# EAGLE board 411_Preliminary Design_ Group8_rev2 (EAGLE 9.6.2)
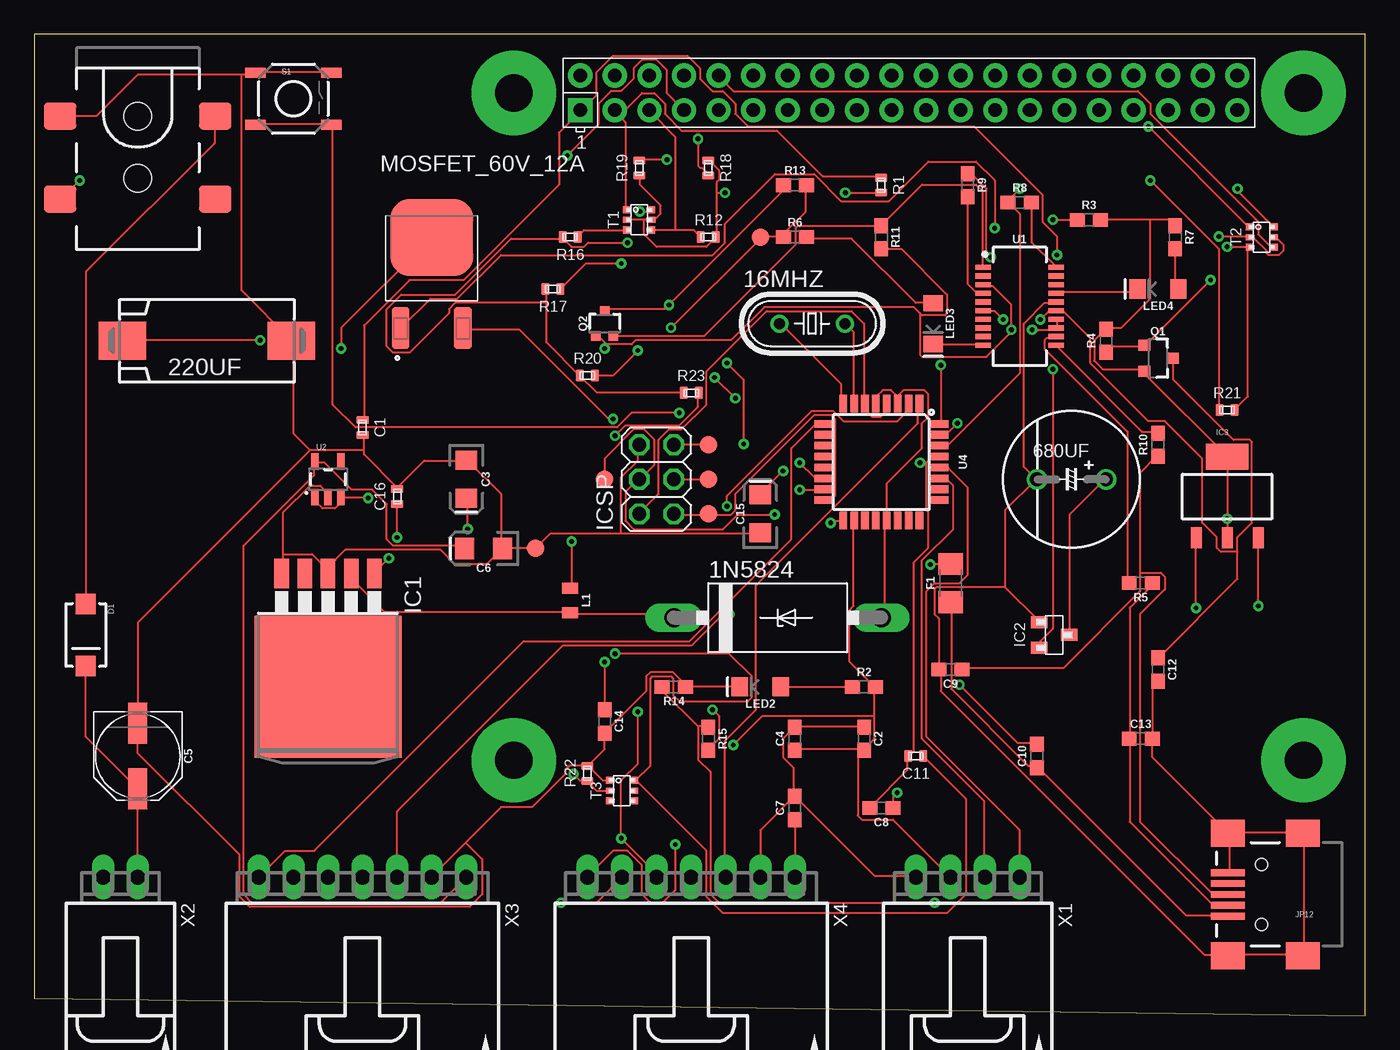
[diagram p0: board, top side]
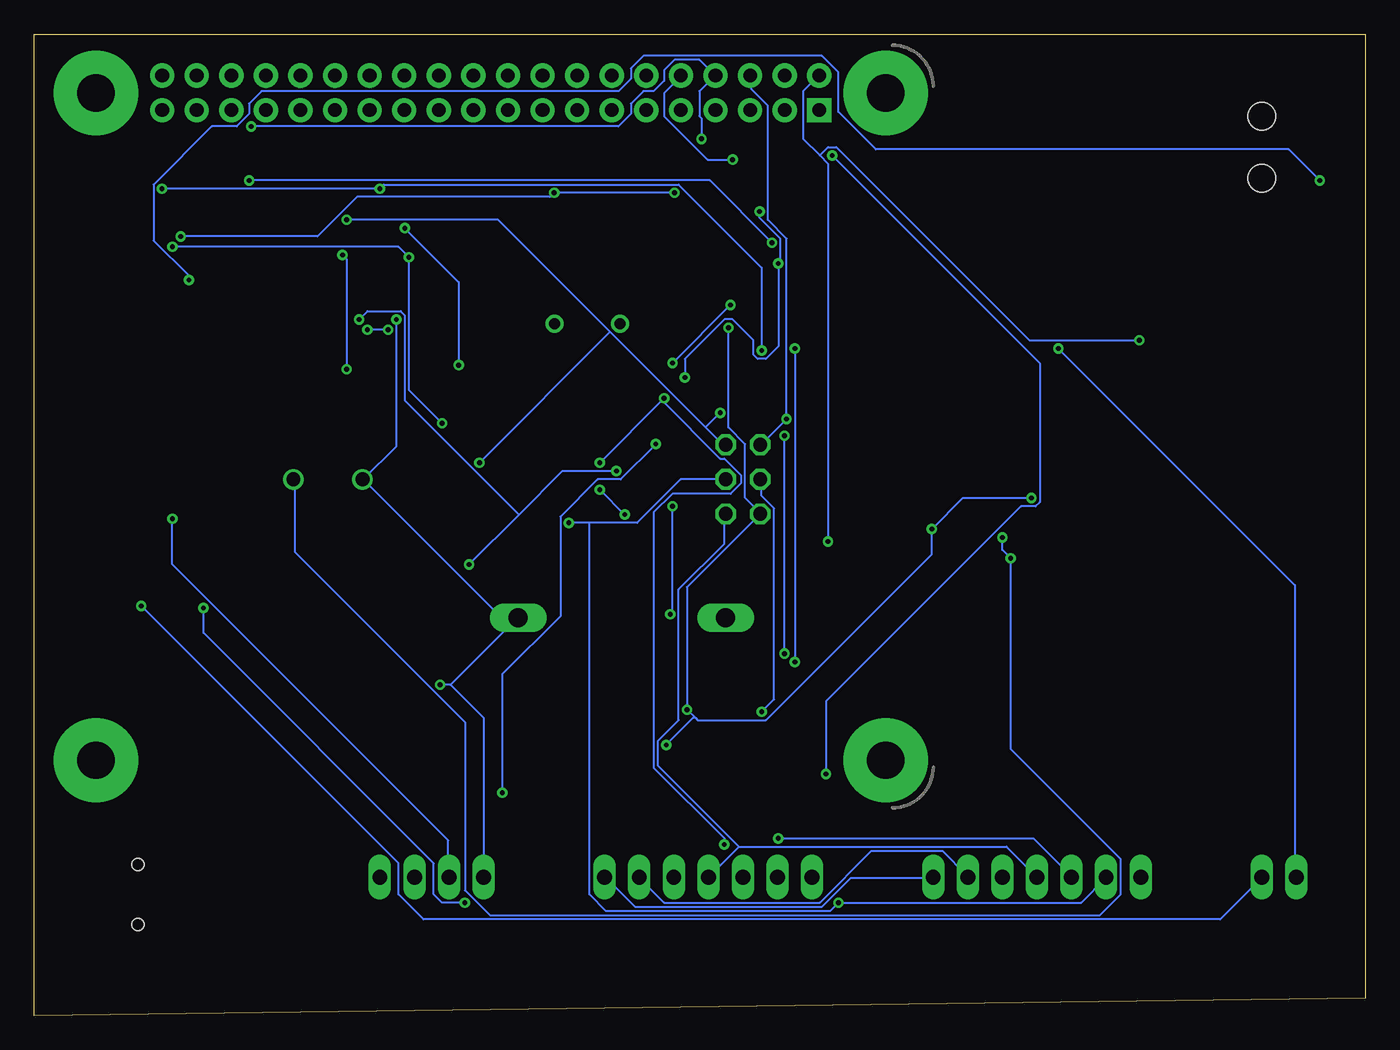
[diagram p1: board, bottom side, seen from below]

Size 97.79 x 72.06 mm. Coordinates in mm from the lower left corner, seen from the top.
Outline: 0,1.27 97.79,0 97.79,13.97 97.77,15.22 97.79,26.67 97.77,72.06 0,72.06 0,1.27
Copper layers (1*16): Top 0.035mm / dielectric 1.5mm / Bottom 0.035mm
Design rules "default": minimum track width 6mil, minimum drill 0.35mm, track to track 6mil, track to pad 6mil, pad to pad 6mil, via to via 6mil, smd to smd 6mil, copper to edge 40mil, drill to drill 6mil, minimum pad ring 10mil, minimum via ring 8mil, stop-mask expansion 4mil, vias tented up to drill 0mil, thermal gap 10mil

## Footprints (pad centres in the part's own frame; a part is rotated, then mirrored left to right if it is on the bottom)
CB429-15 = drill 1.397 long: A 7.62,0; C -7.62,0
HC49/S = drill 0.813: 1 -2.413,0; 2 2.413,0
139CLL-2R = smd 3.5 x 2.8: + 6.2,0; - -6.2,0
16V-10-5.08 = drill 1: + -2.54,0; - 2.54,0
C0402 = smd 0.9 x 0.6: 1 0,0.55; 2 0,-0.55
0603 = smd 1.1 x 1: 1 -0.85,0; 2 0.85,0
EIA3216 = smd 1.4 x 1.6: + 1.4,0; - -1.4,0
PANASONIC_D = smd 3 x 1.4: + 2.4,0; - -2.4,0
SMA-DIODE = smd 1.524 x 1.47: A -2.277,0; C 2.277,0
1206 = smd 1.6 x 1.8: 1 -1.4,0; 2 1.4,0
TO263-5 = smd 1.067 x 2.159: 1 -3.404,-5.791; 2 -1.702,-5.791; 3 0,-5.791; 4 1.702,-5.791; 5 3.404,-5.791 | smd 10.8 x 10.41: 6 0,2.54
SOT23 = smd 1.3 x 0.9: 1 -1.1,0.95; 2 -1.1,-0.95; 3 1.1,0
SOT223-ALT1 = smd 0.813 x 1.524: 1 -2.271,-3.02; 2 0,-3.02; 3 2.288,-3.02 | smd 3.124 x 1.905: 4 0,2.921
2X03 = drill 1.016 octagon: 1 -2.54,-1.27; 2 -2.54,1.27; 3 0,-1.27; 4 0,1.27; 5 2.54,-1.27; 6 2.54,1.27
POWER_JACK_SMD_OVERPASTE_SUPER_BOMB_DIGITY = smd 2 x 2.4: GND 0,-5.7; P$4 6.1,-5.7; VIN0 0,5.7; VIN1 6.1,5.7 | hole 2.032: 0,0; 4.572,0
USB-MINIB = smd 2.5 x 0.5: D+ 2.5,0; D- 2.5,0.8; GND 2.5,-1.6; ID 2.5,-0.8; VBUS 2.5,1.6 | smd 2.5 x 2: MTN1 -3,4.5; MTN2 2.5,4.5; MTN3 -3,-4.5; MTN4 2.5,-4.5 | hole 0.9: 0,2.2; 0,-2.2
0805 = smd 0.8 x 1.2: 1 -0.9,0; 2 0.9,0
LED-1206 = smd 1.2 x 1.4: A -1.5,0; C 1.5,0
DPAK3 = smd 1.31 x 3.08: 1 -2.29,-4.12; 2 2.29,-4.12 | smd 6.09 x 5.63: 3 0,2.51
SOT23-3@1 = smd 0.8 x 0.9: 1 -0.95,-1; 2 0.95,-1; 3 0,1.1
SOT323 = smd 0.7 x 0.7: 1 -0.65,-0.925; 2 0.65,-0.925; 3 0,0.925
TACTILE-SWITCH-SMD = smd 1.524 x 0.762: 1 -2.794,1.905; 2 2.794,1.905; 3 -2.794,-1.905; 4 2.794,-1.905
SOT363 = smd 0.6 x 0.5: 1 -0.9,0.75; 3 -0.9,-0.75; 4 0.9,-0.75; 6 0.9,0.75 | smd 0.6 x 0.4: 2 -0.9,0; 5 0.9,0
PAD.03X.05 = smd 1.27 x 1.27: P$1 0,0
SSOP20_L = smd 0.381 x 1.143: 1 -2.857,-2.68; 2 -2.223,-2.68; 3 -1.587,-2.68; 4 -0.953,-2.68; 5 -0.318,-2.68; 6 0.318,-2.68; 7 0.953,-2.68; 8 1.587,-2.68; 9 2.223,-2.68; 10 2.857,-2.68; 11 2.857,2.68; 12 2.223,2.68; 13 1.587,2.68; 14 0.953,2.68; 15 0.318,2.68; 16 -0.318,2.68; 17 -0.953,2.68; 18 -1.587,2.68; 19 -2.223,2.68; 20 -2.857,2.68
SOT23-5 = smd 0.55 x 1.2: 1 -0.95,-1.3; 2 0,-1.3; 3 0.95,-1.3; 4 0.95,1.3; 5 -0.95,1.3
TQFP32-08 = smd 1.27 x 0.559: 1 -4.293,2.8; 2 -4.293,2; 3 -4.293,1.2; 4 -4.293,0.4; 5 -4.293,-0.4; 6 -4.293,-1.2; 7 -4.293,-2; 8 -4.293,-2.8; 17 4.293,-2.8; 18 4.293,-2; 19 4.293,-1.2; 20 4.293,-0.4; 21 4.293,0.4; 22 4.293,1.2; 23 4.293,2; 24 4.293,2.8 | smd 0.559 x 1.27: 9 -2.8,-4.293; 10 -2,-4.293; 11 -1.2,-4.293; 12 -0.4,-4.293; 13 0.4,-4.293; 14 1.2,-4.293; 15 2,-4.293; 16 2.8,-4.293; 25 2.8,4.293; 26 2,4.293; 27 1.2,4.293; 28 0.4,4.293; 29 -0.4,4.293; 30 -1.2,4.293; 31 -2,4.293; 32 -2.8,4.293
70553-04 = drill 1.092 long: 1 -3.81,-7.62; 2 -1.27,-7.62; 3 1.27,-7.62; 4 3.81,-7.62
70553-02 = drill 1.092 long: 1 -1.27,-7.62; 2 1.27,-7.62
70553-07 = drill 1.092 long: 1 -7.62,-7.62; 2 -5.08,-7.62; 3 -2.54,-7.62; 4 0,-7.62; 5 2.54,-7.62; 6 5.08,-7.62; 7 7.62,-7.62
RASPI_BOARD_B+_EDGES_4DRILL_PAD = drill 1 pad 1.778 square: 1 8.37,51.23 | drill 1 pad 1.778: 2 8.37,53.77; 3 10.91,51.23; 4 10.91,53.77; 5 13.45,51.23; 6 13.45,53.77; 7 15.99,51.23; 8 15.99,53.77; 9 18.53,51.23; 10 18.53,53.77; 11 21.07,51.23; 12 21.07,53.77; 13 23.61,51.23; 14 23.61,53.77; 15 26.15,51.23; 16 26.15,53.77; 17 28.69,51.23; 18 28.69,53.77; 19 31.23,51.23; 20 31.23,53.77; 21 33.77,51.23; 22 33.77,53.77; 23 36.31,51.23; 24 36.31,53.77; 25 38.85,51.23; 26 38.85,53.77; 27 41.39,51.23; 28 41.39,53.77; 29 43.93,51.23; 30 43.93,53.77; 31 46.47,51.23; 32 46.47,53.77; 33 49.01,51.23; 34 49.01,53.77; 35 51.55,51.23; 36 51.55,53.77; 37 54.09,51.23; 38 54.09,53.77; 39 56.63,51.23; 40 56.63,53.77 | drill 2.75 pad 6.2: 41 3.5,3.5; 42 61.5,3.5; 43 61.5,52.5; 44 3.5,52.5

## Placement (x,y rotation side)
1N5824  [CB429-15]  54.61,29.21 0 top
16MHZ  [HC49/S]  57.15,50.8 0 top
220UF  [139CLL-2R]  12.7,49.53 180 top
680UF  [16V-10-5.08]  76.2,39.37 180 top
C1  2u2  [C0402]  24.13,43.18 180 top
C2  0.1uF  [0603]  60.96,20.32 270 top
C3  10uF  [EIA3216]  31.75,39.37 270 top
C4  0.1uF  [0603]  55.88,20.32 90 top
C5  47uF  [PANASONIC_D]  7.62,19.05 270 top
C6  10uF  [EIA3216]  33.02,34.29 180 top
C7  1.0uF  [0603]  55.88,15.24 90 top
C8  0.1uF  [0603]  62.23,15.24 180 top
C9  47pF  [0603]  67.31,25.4 180 top
C10  0.1uF  [0603]  73.66,19.05 90 top
C11  100n  [C0402]  64.77,19.05 90 top
C12  0.1uF  [0603]  82.55,25.4 270 top
C13  47pF  [0603]  81.28,20.32 0 top
C14  0.1uF  [0603]  41.91,21.59 270 top
C15  10uF  [EIA3216]  53.34,36.83 90 top
C16  2u2  [C0402]  26.67,38.1 0 top
D1  MBRA140  [SMA-DIODE]  3.81,27.94 270 top
F1  6V/0.5A  [1206]  67.31,31.75 90 top
IC1  LM2596S  [TO263-5]  21.59,26.67 180 top
IC2  LDO-TS9011-3V3  [SOT23]  74.93,27.94 0 top
IC3  LM1117  [SOT223-ALT1]  87.63,38.1 0 top
ICSP  [2X03]  45.72,39.37 90 top
J3  POWER_JACKSUPER_BOMB_DIGITY  [POWER_JACK_SMD_OVERPASTE_SUPER_BOMB_DIGITY]  7.62,66.04 270 top
JP12  USB-MINIB-5PIN  [USB-MINIB]  90.17,8.89 180 top
L1  33µH  [0805]  39.37,30.48 270 top
LED2  Green  [LED-1206]  53.34,24.13 180 top
LED3  Red  [LED-1206]  66.04,50.8 270 top
LED4  Yellow  [LED-1206]  82.55,53.34 180 top
MOSFET_60V_12A  NTD3055L104G  [DPAK3]  29.21,54.61 0 top
Q1  1A/60V/500mΩ  [SOT23-3@1]  82.55,48.26 270 top
Q2  310mA/60V/1.6Ω  [SOT323]  41.91,50.8 0 top
R1  4k7  [C0402]  62.23,60.96 180 top
R2  4.7k  [0603]  60.96,24.13 0 top
R3  10k  [0603]  77.47,58.42 0 top
R4  10k  [0603]  78.74,49.53 90 top
R5  27  [0603]  81.28,31.75 180 top
R6  1k  [0603]  55.88,57.15 0 top
R7  1k  [0603]  83.82,57.15 270 top
R8  1k  [0603]  72.39,59.69 0 top
R9  1k  [0603]  68.58,60.96 270 top
R10  27  [0603]  82.55,41.91 90 top
R11  10k  [0603]  62.23,57.15 270 top
R12  4k7  [C0402]  49.53,57.15 270 top
R13  10k  [0603]  55.88,60.96 0 top
R14  715  [0603]  46.99,24.13 180 top
R15  240  [0603]  49.53,20.32 270 top
R16  4k7  [C0402]  39.37,57.15 90 top
R17  4k7  [C0402]  38.1,53.34 90 top
R18  4k7  [C0402]  49.53,62.23 180 top
R19  4k7  [C0402]  44.45,62.23 0 top
R20  4k7  [C0402]  40.64,46.99 270 top
R21  4k7  [C0402]  87.63,44.45 270 top
R22  4k7  [C0402]  40.64,17.78 0 top
R23  4k7  [C0402]  48.26,45.72 270 top
S1  RESET  [TACTILE-SWITCH-SMD]  19.05,67.31 0 top
T1  BSS138PS  [SOT363]  44.45,58.42 0 top
T2  BSS138PS  [SOT363]  90.17,57.15 0 top
T3  BSS138PS  [SOT363]  43.18,16.51 0 top
TP1  TP-3x5  [PAD.03X.05]  53.34,57.15 0 top
TP2  TP-3x5  [PAD.03X.05]  41.91,39.37 0 top
TP3  TP-3x5  [PAD.03X.05]  36.83,34.29 0 top
TP4  TP-3x5  [PAD.03X.05]  49.53,36.83 0 top
TP5  TP-3x5  [PAD.03X.05]  49.53,39.37 0 top
TP6  TP-3x5  [PAD.03X.05]  49.53,41.91 0 top
U1  FT231XS  [SSOP20_L]  72.39,52.07 270 top
U2  MIC5205  [SOT23-5]  21.59,39.37 0 top
U4  ATMEGA328P_TQFP  [TQFP32-08]  62.23,40.64 270 top
X1  C-GRID-04-70553  [70553-04]  68.58,2.54 180 top
X2  C-GRID-02-70553  [70553-02]  6.35,2.54 180 top
X3  C-GRID-07-70553  [70553-07]  24.13,2.54 180 top
X4  C-GRID-07-70553  [70553-07]  48.26,2.54 180 top
X5  RASPI_BOARD_B+_E4P  [RASPI_BOARD_B+_EDGES_4DRILL_PAD]  31.75,15.24 0 top

## Library data of the parts
1N5824 220UF = adafruit
16MHZ = crystal; OC_FARNELL: 1667008; OC_NEWARK: unknown
680UF = c-j
C1 C11 C16 R1 R12 R16-R23 = we-rcl
C2 C4 C8 C10 C12 C14 = SparkFun-Capacitors; PROD_ID: CAP-00810
C3 C6 C15 = SparkFun-Capacitors; PROD_ID: CAP-00811
C5 = SparkFun-Capacitors; PROD_ID: CAP-08478
C7 = SparkFun-Capacitors; PROD_ID: CAP-00868
C9 C13 = SparkFun-Capacitors; PROD_ID: CAP-08913
D1 = SparkFun-DiscreteSemi; PROD_ID: DIO-08053
F1 = SparkFun-Fuses; PROD_ID: RES-08585
IC1 = national-semiconductor; MF: NATIONAL SEMICONDUCTOR; MPN: LM2596S-ADJ/NOPB; OC_FARNELL: 9494367; OC_NEWARK: 41K3842
IC2 = we-power
IC3 = Testing; PROD_ID: VREG-08170
ICSP = pinhead
J3 = Testing; PROD_ID: CONN-08106
JP12 = SparkFun-Connectors; PROD_ID: CONN-08193
L1 = SparkFun-Coils; PROD_ID: NDUC-13076
LED2 = SparkFun-LED; PROD_ID: DIO-09910
LED3 = SparkFun-LED; PROD_ID: DIO-09912
LED4 = SparkFun-LED; PROD_ID: DIO-09909
MOSFET_60V_12A = Transistor; CREATED_BY: PCBLayout.com; MANUFACTURER: ON SEMICONDUCTORS; MPN: NTD3055L104G; PACKAGE: DPAK-4
Q1 = SparkFun-DiscreteSemi; PROD_ID: TRANS-08285
Q2 = SparkFun-DiscreteSemi; PROD_ID: TRANS-11151
R2 = SparkFun-Resistors; PROD_ID: RES-07857
R3 R4 R11 R13 = SparkFun-Resistors; PROD_ID: RES-00824
R5 R10 = SparkFun-Resistors; PROD_ID: RES-09334
R6-R9 = SparkFun-Resistors; PROD_ID: RES-07856
R14 = SparkFun-Resistors; PROD_ID: RES-07850
R15 = SparkFun-Resistors; PROD_ID: RES-07849
S1 = SparkFun-Electromechanical; PROD_ID: SWCH-08247
T1-T3 = we-transistor
TP1-TP4 TP6 = SparkFun-Connectors
TP5 = SparkFun-Passives
U1 = SparkFun-IC-Comms; PROD_ID: IC-11524
U2 = SparkFun-PowerIC; PROD_ID: VREG-00822
U4 = SparkFun-IC-Microcontroller; PROD_ID: IC-09069
X1-X4 = con-molex; MF: MOLEX; OC_FARNELL: unknown; OC_NEWARK: unknown
X5 = raspberrypi_bastelstube_v13

## Nets
3.3V: C6.+ C7.1 U2.5 X3.1 X4.1
3.3V_F: C14.1 Q2.1 R11.2 U1.3 U1.13 U1.14
5V: C2.2 C3.+ C4.1 IC3.2 IC3.4 ICSP.2 Q1.2 R2.2 R3.2 R4.2 R6.1 R7.1 R13.2 R15.2 TP1.P$1 U2.1 U2.3 U4.4 U4.6 U4.18 X1.3
+3V3: R1.1 R12.1 R18.2 R19.2 T1.2 T1.5 T2.2 T2.5
+5V: R16.1 R17.1 R20.2 R21.2 R23.2
A0: U4.23
A1: U4.24
A2: U4.25
A3: U4.26
A4/SDA: U4.27 X1.2
A5/SCL: U4.28 X1.1
AREF: U4.20
D0_RX1: C11.2 R23.1 T3.6
D+: C9.1 JP12.D+ R10.1
D-: C13.1 JP12.D- R5.1
DTR: C8.1 Q2.3 R13.1
FTDI_DTR: Q2.2 R11.1 U1.1
GND: 1N5824.A 220UF.- 680UF.- C1.1 C2.1 C3.- C4.2 C5.- C6.- C7.2 C9.2 C10.2 C12.2 C13.2 C14.2 C15.- C16.1 IC1.3 IC1.5 IC2.1 ICSP.6 J3.GND JP12.GND JP12.MTN1 JP12.MTN2 JP12.MTN3 JP12.MTN4 LED2.C MOSFET_60V_12A.2 R14.1 R22.1 S1.1 S1.2 T3.1 TP3.P$1 U1.6 U1.16 U2.2 U4.3 U4.5 U4.21 X1.4 X3.2 X4.2 X5.6
GPIO2: MOSFET_60V_12A.1 U4.32
GPIO3: U4.1 X4.3
GPIO4: U4.2 X3.3
GPIO5: U4.9 X3.7
GPIO6: U4.10
GPIO7: U4.11
GPIO8: U4.12
GPIO9: U4.13
INSERT: J3.P$4 Q1.1 R4.1
IO4: R22.2 T3.2 X5.7
MISO: ICSP.1 TP4.P$1 U4.16 X3.4 X4.4
MOSI: ICSP.4 TP2.P$1 U4.15 X3.5 X4.5
N$1: 1N5824.C IC1.2 L1.2
N$2: LED2.A R2.1
N$3: 16MHZ.2 U4.7
N$4: 16MHZ.1 U4.8
N$5: MOSFET_60V_12A.3 X2.2
N$6: R5.2 U1.12
N$7: R10.2 U1.11
N$8: LED3.A R6.2
N$9: IC1.4
N$10: LED4.A R7.2
N$15: IC3.1 R14.2 R15.1
PI_3V3: C1.2 IC2.2 X5.1
PI_5V: 220UF.+ L1.1 X5.2
PI_RX: R19.1 T2.4 X5.10
PI_SCL: R12.2 T1.4 X5.5
PI_SDA: R1.2 T1.1 X5.3
PI_TX: R18.1 T2.1 X5.8
PI_V: 680UF.+ C16.2 IC1.1 IC2.3
PWRIN: D1.A J3.VIN0
RESET: C8.2 C11.1 ICSP.5 R3.1 S1.3 S1.4 TP6.P$1 U4.29
RX: R8.1 R20.1 T2.6 U4.30
RXD: R9.2 U1.4
RXLED: LED4.C U1.17
SCK: ICSP.3 TP5.P$1 U4.17 X3.6 X4.6
SCL: R16.2 T1.3
SDA: R17.2 T1.6 U4.14 X4.7
TX: R9.1 R21.1 T2.3 U4.31
TXD: R8.2 U1.20
TXLED: LED3.C U1.10
USBVCC: C12.1 C15.+ F1.2 Q1.3 U1.15
VIN: C5.+ D1.C IC3.3 X2.1
VUSB: C10.1 F1.1 JP12.VBUS

## Tracks (layer width: path | path; a pad name or v marks a point on that pad's centre or on a via)
3.3V
  Top 0.152: C6.+ 31.55,34.34 31.39,34.49 26.36,34.49 25.91,34.95 25.91,37.54 24.84,38.61 23.32,38.61 21.34,40.59 20.73,40.59 U2.5 20.57,40.59 20.57,39.68 15.39,34.49 15.39,8.89 16,8.28 29.87,8.28 X3.1 | C7.1 55.93,14.38 55.93,10.26 X4.1
  Bottom 0.152: X3.1 31.85,10.11 37.8,10.11 39.93,7.98 53.65,7.98 55.78,10.11 X4.1
3.3V_F  (via drill 0.35)
  Top 0.152: U1.14 75.13,51.11 75.13,50.5 U1.13 74.98,50.34 v73.3,50.34 | 42.22,49.28 43.89,49.28 44.2,49.58 51.21,49.58 53.65,52.02 64.62,52.02 65.08,51.56 | 42.22,49.28 42.06,49.28 41.6,49.73 41.3,49.73 Q2.1 | 65.08,51.56 65.23,51.41 66.9,51.41 67.06,51.56 67.06,52.93 63.7,56.29 62.33,56.29 R11.2 | v41.91,25.96 C14.1 | 42.22,49.28 v41.91,48.97 | 65.08,51.56 65.08,48.51 65.23,48.36 69.95,48.36 71.78,50.19 v71.78,50.34 71.78,52.17 70.41,53.54 69.8,53.54 U1.3
  Bottom 0.152: v41.91,48.97 v41.91,25.96 | v71.78,50.34 v73.3,50.34
5V  (via drill 0.35)
  Top 0.152: 81.99,58.42 83.52,58.42 83.82,58.12 R7.1 | 81.99,58.42 R3.2 | IC3.2 v87.63,36.47 IC3.4 87.63,41.05 81.69,46.99 81.69,47.3 Q1.2 81.53,47.45 78.49,47.45 77.88,48.06 77.88,49.58 78.64,50.34 R4.2 78.79,50.5 79.86,50.5 81.99,52.63 81.99,58.42 | 60.96,19.56 60.5,19.56 | 60.5,19.56 55.93,19.56 C4.1 | 61.72,22 61.72,20.32 60.96,19.56 | 61.72,22 61.72,24.13 | 60.96,19.56 C2.2 60.5,19.56 | 61.72,24.13 59.89,25.96 59.89,29.77 60.2,30.07 60.2,36.32 U4.18 | 61.72,24.13 R2.2 | X1.3 63.09,14.38 60.81,14.38 60.5,14.68 60.5,19.56 | 54.86,57.2 53.34,57.2 TP1.P$1 53.34,57.05 v46.79,50.5 | 54.86,57.2 55.02,57.2 R6.1 54.86,57.2 | 54.86,57.2 56.69,59.03 56.69,60.86 R13.2 | U4.4 62.48,44.86 62.48,44.25 62.18,43.94 61.57,43.94 61.11,44.4 61.11,44.86 U4.6 60.96,45.01 60.96,50.8 60.05,51.71 53.8,51.71 49.38,47.3 49.38,44.86 47.55,43.03 46.63,43.03 45.87,42.27 45.87,38.3 44.5,36.93 ICSP.2 | U2.1 20.73,38 20.73,37.69 21.18,37.24 22.1,37.24 22.4,37.54 22.4,38 U2.3 22.55,38 v24.54,38 | v49.84,22.45 50.29,22 50.29,20.32 49.53,19.56 R15.2 | v31.85,35.71 31.85,37.85 C3.+ | 61.72,22 53.49,22 v51.36,19.86
  Bottom 0.152: v87.63,36.47 87.63,33.12 67.36,12.85 67.36,10.26 X1.3 | 49.23,21.84 v49.84,22.45 49.84,31.45 ICSP.2 44.5,36.93 45.57,38 45.57,41.96 46.79,43.18 v46.79,50.5 | 49.23,21.84 49.07,21.69 44.04,21.69 31.85,33.88 v31.85,35.71 29.57,38 v24.54,38 | v51.36,19.86 49.38,21.84 49.23,21.84
+3V3  (via drill 0.35)
  Top 0.152: 44.81,58.42 T1.5 45.57,58.42 46.02,58.88 46.02,59.49 44.5,61.01 44.5,61.62 R19.2 | 44.81,58.42 T1.2 | T2.5 91.14,57.2 91.75,56.59 91.75,56.13 91.44,55.83 90.68,55.83 90.53,55.98 90.53,56.13 89.61,57.05 89.31,57.05 T2.2 89.15,57.2 v87.02,57.2 | 50.14,60.4 50.14,61.16 50.29,61.32 50.29,62.08 49.53,62.84 R18.2 | 50.14,60.4 50.14,57.2 R12.1 49.99,57.05 49.38,56.44 45.72,56.44 44.81,57.35 44.81,58.42 | v59.59,60.4 62.18,60.4 R1.1 | 50.14,60.4 v50.75,60.4
  Bottom 0.152: v50.75,60.4 v59.59,60.4 59.89,60.1 74.07,60.1 76.96,57.2 v87.02,57.2
+5V  (via drill 0.35)
  Top 0.152: 37.64,52.32 37.64,49.43 R20.2 | 37.64,52.32 37.64,53.24 R17.1 | R20.2 41.3,45.77 47.7,45.77 R23.2 | R20.2 | 37.64,52.32 30.94,52.32 30.48,51.87 30.48,51.56 27.58,48.67 26.36,48.67 25.91,49.12 25.91,51.87 26.98,52.93 30.94,52.93 35.05,57.05 38.71,57.05 R16.1 38.86,57.05 39.47,56.44 40.39,56.44 40.69,56.74 v43.59,56.74 | v81.99,61.32 87.02,56.29 87.02,44.55 R21.2
  Bottom 0.152: v81.99,61.32 48.16,61.32 v43.59,56.74
A4/SDA
  Top 0.152: U4.27 66.6,39.37 67.06,39.37 67.51,38.91 67.51,35.71 65.23,33.43 65.23,20.32 69.8,15.75 69.8,10.26 X1.2
A5/SCL
  Top 0.152: X1.1 72.39,13.61 65.53,20.47 65.53,31.14 66.14,31.75 67.97,31.75 68.58,32.36 68.58,38.76 67.21,40.13 66.6,40.13 U4.28
D0_RX1  (via drill 0.35)
  Top 0.152: C11.2 65.38,18.95 68.43,15.9 68.43,8.89 67.06,7.52 50.6,7.52 49.38,8.74 49.38,12.09 44.35,17.12 44.2,17.12 T3.6 44.2,17.27 45.26,18.34 45.26,24.74 45.41,24.89 46.79,24.89 46.94,24.74 46.94,23.52 47.4,23.06 52.43,23.06 52.73,23.37 52.73,24.89 51.05,26.57 v42.67,26.57 | v42.67,42.57 43.43,43.33 47.4,43.33 48.77,44.7 48.77,45.62 R23.1
  Bottom 0.152: v42.67,26.57 v42.67,42.57
D+
  Top 0.152: 81.23,32.51 81.23,39.83 82.45,41.05 R10.1 | 81.23,32.51 81.23,31.14 75.59,25.5 68.28,25.5 C9.1 | JP12.D+ 86.56,8.89 81.23,14.22 81.23,29.46 83.06,31.29 83.06,32.21 82.75,32.51 81.23,32.51
D-
  Top 0.152: 80.47,20.32 80.47,29.92 81.99,31.45 81.99,31.75 R5.1 | 80.47,20.32 80.47,14.22 86.56,8.13 87.63,8.13 JP12.D- | 80.47,20.32 C13.1
DTR  (via drill 0.35)
  Top 0.152: Q2.3 41.91,51.87 46.33,51.87 v46.63,52.17 55.02,60.55 55.02,60.86 R13.1 | v63.4,16.36 63.09,16.05 63.09,15.29 C8.1 | v52.12,41.96 52.12,46.69 v50.9,47.9
  Bottom 0.152: v63.4,16.36 63.4,25.04 59.13,29.31 59.13,36.63 56.39,39.37 54.71,39.37 v52.12,41.96 | v46.63,52.17 v50.9,47.9
FTDI_DTR
  Top 0.152: Q2.2 42.67,49.89 49.23,49.89 55.93,56.59 55.93,57.81 56.08,57.96 62.18,57.96 R11.1 62.33,58.12 65.23,61.01 69.19,61.01 69.65,60.55 69.65,55.07 U1.1
GND  (via drill 0.35)
  Top 0.152: 18.29,33.88 18.29,32.51 IC1.5 | 18.29,33.88 18.29,36.93 20.27,38.91 21.03,38.91 21.49,38.46 21.49,38.15 U2.2 | 21.49,32.82 21.49,32.51 IC1.3 21.49,32.82 | 21.49,32.82 20.42,33.88 18.29,33.88 | C6.- 34.44,34.34 36.73,34.34 TP3.P$1 37.95,35.41 43.13,35.41 | 43.13,35.41 53.34,35.41 C15.- | 43.13,35.41 43.13,39.52 44.35,40.74 44.35,41.81 ICSP.6 | v42.52,43.79 42.22,43.79 35.66,50.34 31.55,50.34 MOSFET_60V_12A.2 | 21.49,32.82 22.86,34.19 29.87,34.19 30.94,33.12 33.22,33.12 34.29,34.19 C6.- | S1.2 21.79,69.24 16.31,69.24 S1.1 16.15,69.09 15.24,69.09 | J3.GND 4.57,66.04 7.62,69.09 15.24,69.09 | 24.23,41.5 24.23,41.2 26.67,38.76 | 24.23,41.5 24.23,42.57 C1.1 | 26.67,38.76 28.65,40.74 31.7,40.74 C3.- 31.85,40.74 34.29,38.3 34.29,34.34 C6.- | 26.67,38.76 C16.1 | 20.27,41.5 7.62,28.85 C5.- 7.62,19.25 15.09,11.79 15.09,8.74 15.85,7.98 32,7.98 32.92,8.89 32.92,11.48 31.7,12.7 | 24.23,41.5 20.27,41.5 | 20.27,41.5 19.05,42.72 19.05,49.43 220UF.- 18.9,49.58 15.24,53.24 15.24,69.09 | 82.14,20.32 82.14,24.13 82.45,24.43 C12.2 | JP12.GND 87.78,10.57 87.78,13.31 JP12.MTN4 | JP12.MTN4 87.78,13.46 93.12,13.46 JP12.MTN3 93.27,13.31 93.27,4.47 JP12.MTN1 93.12,4.47 87.78,4.47 JP12.MTN2 87.63,4.47 85.95,4.47 66.6,23.82 66.6,25.35 C9.2 66.45,25.5 66.45,29.16 66.14,29.46 66.14,31.29 66.29,31.45 71.32,31.45 | 82.14,20.32 82.14,18.95 87.63,13.46 JP12.MTN4 | 82.14,20.32 C13.2 | 71.32,31.45 73.76,29.01 IC2.1 | v71.17,51.11 70.56,51.71 69.8,51.71 U1.6 | 73.61,39.37 72.69,40.28 72.69,50.8 74.22,52.32 74.98,52.32 U1.16 | 71.32,31.45 71.32,37.08 73.61,39.37 | 73.61,39.37 680UF.- | 40.69,18.34 41.76,17.27 42.22,17.27 T3.1
  Top 0.152: 40.69,18.34 41.91,19.56 C14.2 41.91,20.78 44.96,23.82 44.96,24.89 45.26,25.2 46.94,25.2 48.01,24.13 | 40.69,18.34 R22.1 40.54,18.34 39.32,18.34 39.01,18.03 39.01,17.73 36.58,15.29 34.29,15.29 31.7,12.7 | LED2.C 48.01,24.13 | 48.01,24.13 R14.1 47.85,24.13 | 31.7,12.7 29.26,10.26 X3.2 | C7.2 55.78,16.21 55.78,18.19 55.02,18.95 55.02,20.32 55.78,21.08 C4.2 55.93,21.23 60.96,21.23 C2.1 | X4.2 53.34,13.61 55.78,16.05 C7.2 | X1.4 64.77,10.26 61.72,10.26 55.93,16.05 C7.2 | 63.4,45.47 62.94,45.92 62.33,45.92 61.87,45.47 61.87,45.01 U4.5 | 63.4,45.47 63.4,45.01 U4.3 63.4,45.47 | v67.97,24.28 72.24,20.02 73.61,20.02 C10.2 | 1N5824.A 62.48,29.46 62.48,36.32 U4.21 62.64,36.47 62.64,39.07 65.23,41.66 65.23,43.49 65.68,43.94 65.68,45.62 65.38,45.92 63.86,45.92 63.4,45.47
  Bottom 0.152: ICSP.6 44.35,41.96 v42.52,43.79 42.52,57.05 43.89,58.42 43.89,66.8 45.11,68.02 45.11,68.94 X5.6 | v71.17,51.11 71.17,41.81 73.61,39.37 | 67.21,24.28 v67.97,24.28 | 62.79,28.7 62.33,29.16 1N5824.A 62.79,28.7 | 62.79,28.7 67.21,24.28 | X1.4 64.77,21.84 67.21,24.28 | X3.2 29.26,10.26 31.09,12.09 36.27,12.09 40.08,8.28 51.51,8.28 53.34,10.11 X4.2 | 73.61,39.37 62.94,28.7 62.79,28.7 | 73.61,39.37 680UF.-
GPIO2  (via drill 0.35)
  Top 0.152: v66.6,47.75 66.6,43.49 U4.32 | v70.56,57.81 70.56,61.32 69.19,62.69 65.68,62.69 62.79,59.79 59.28,59.79 57.3,61.77 54.41,61.77 50.75,58.12 50.75,56.74 49.84,55.83 34.29,55.83 31.09,52.63 29.11,52.63 26.98,50.5 MOSFET_60V_12A.1
  Bottom 0.152: v66.6,47.75 66.6,53.85 v70.56,57.81
GPIO3
  Top 0.152: U4.1 64.92,44.86 64.92,43.49 53.03,31.6 53.03,22.45 50.75,20.17 50.75,10.26 X4.3
GPIO4  (via drill 0.35)
  Top 0.152: v50.9,37.39 50.9,38.15 57.15,44.4 58.67,44.4 59.44,43.64 63.4,43.64 64.16,44.4 64.16,44.86 U4.2 | v51.05,29.46 50.6,29.46 48.31,27.18 38.86,27.18 26.67,14.99 X3.3
  Bottom 0.152: v50.9,37.39 50.9,29.62 v51.05,29.46
GPIO5
  Top 0.152: X3.7 18.44,12.09 20.57,12.09 35.97,27.48 48.16,27.48 55.63,34.95 55.63,41.66 57.3,43.33 57.91,43.33 U4.9
INSERT  (via drill 0.35)
  Top 0.152: R4.1 78.79,48.82 79.1,49.12 81.53,49.12 Q1.1 81.69,49.28 v86.41,54 | v3.35,61.32 1.98,59.94 J3.P$4
  Bottom 0.152: v86.41,54 86.41,54.3 89,56.9 89,61.01 84.73,65.28 82.91,65.28 81.99,66.19 81.99,66.95 81.08,67.87 54.86,67.87 53.95,68.78 53.95,69.55 53.03,70.46 39.93,70.46 38.71,69.24 38.71,66.34 35.97,63.6 5.64,63.6 v3.35,61.32
IO4  (via drill 0.35)
  Top 0.152: T3.2 41.3,16.51 40.69,17.12 R22.2 40.54,17.27 40.08,17.27 v39.62,17.73 | v39.17,63.14 41.45,65.43 41.45,66.95 42.37,67.87 43.13,67.87 44.04,68.78 44.04,69.55 44.65,70.16 45.72,70.16 46.48,69.39 46.48,67.72 47.7,66.5 X5.7
  Bottom 0.152: v39.62,17.73 39.62,23.06 25.3,37.39 24.23,37.39 23.93,37.69 23.93,47.9 v39.17,63.14
MISO
  Top 0.152: 49.53,36.78 47.09,36.78 ICSP.1 | 49.53,36.78 51.21,36.78 51.51,37.08 51.51,38.3 57.3,44.09 58.52,44.09 58.83,43.79 58.83,38.15 58.52,37.85 58.06,37.85 U4.16 | 49.53,36.78 TP4.P$1
  Bottom 0.152: X3.4 26.36,12.39 46.02,12.39 | X4.4 46.02,12.39 | 46.02,12.39 51.97,18.34 51.97,20.17 50.44,21.69 50.44,31.29 47.09,34.65 47.09,36.78 ICSP.1
MOSI  (via drill 0.35)
  Top 0.152: TP2.P$1 41.91,40.89 44.04,43.03 44.81,43.03 45.57,42.27 45.57,40.44 44.5,39.37 ICSP.4 44.35,39.37 43.43,38.46 43.43,36.32 44.04,35.71 50.6,35.71 51.66,36.78 v54.41,36.78 | v56.24,38.61 57.91,38.61 U4.15 | X4.5 45.72,10.41 v43.13,13 43.13,17.27 44.35,18.49 v44.35,22.3
  Bottom 0.152: v54.41,36.78 v56.24,38.61 | v43.13,13 24.38,13 21.64,10.26 X3.5 | v44.35,22.3 43.43,23.22 43.43,37.24 44.35,38.15 44.35,39.37 ICSP.4
N$1
  Top 0.152: 1N5824.C 46.94,29.31 46.79,29.46 39.47,29.46 L1.2 39.32,29.62 25.76,29.62 23.32,32.05 23.32,32.36 IC1.2
N$2
  Top 0.152: LED2.A R2.1
N$3
  Top 0.152: U4.7 60.2,45.01 60.2,50.19 59.59,50.8 16MHZ.2
N$4
  Top 0.152: U4.8 59.28,45.01 59.28,46.38 54.86,50.8 16MHZ.1
N$5  (via drill 0.35)
  Top 0.152: v22.55,48.97 22.55,50.5 29.11,57.05 MOSFET_60V_12A.3
  Bottom 0.152: v22.55,48.97 5.18,31.6 5.18,10.26 X2.2
N$6
  Top 0.152: R5.2 80.31,31.75 80.31,42.88 74.22,48.97 74.22,49.58 74.37,49.73 74.98,49.73 U1.12
N$7
  Top 0.152: R10.2 82.45,42.88 81.38,42.88 75.13,49.12 U1.11
N$8
  Top 0.152: R6.2 56.84,57.05 60.05,57.05 64.77,52.32 65.99,52.32 LED3.A
N$10
  Top 0.152: R7.2 83.82,53.54 83.97,53.39 LED4.A
N$15  (via drill 0.35)
  Top 0.152: 48.77,21.23 46.18,23.82 46.18,24.13 R14.2 | 48.77,21.23 49.53,21.23 R15.1 | v85.34,29.92 85.34,34.95 IC3.1 | v66.14,8.28 50.29,8.28 49.68,8.89 49.68,17.88 48.77,18.8 48.77,21.23
  Bottom 0.152: v85.34,29.92 85.34,28.09 68.43,11.18 68.43,8.89 67.82,8.28 v66.14,8.28
PI_3V3  (via drill 0.35)
  Top 0.152: C1.2 24.23,43.79 24.23,50.65 27.58,54 31.55,54 38.56,61.01 38.56,64.82 40.08,66.34 X5.1 40.23,66.5 41.3,67.56 41.3,69.24 42.52,70.46 48.01,70.46 48.92,69.55 48.92,68.78 49.84,67.87 50.6,67.87 51.51,66.95 51.51,66.19 52.43,65.28 69.04,65.28 74.07,60.25 74.07,58.27 75.13,57.2 v75.13,55.83 | v74.83,47.45 74.83,28.4 73.91,27.48 73.91,27.03 IC2.2
  Bottom 0.152: v74.83,47.45 74.83,55.52 v75.13,55.83
PI_5V  (via drill 0.35)
  Top 0.152: v39.47,34.8 39.47,31.45 L1.1 | v16.61,49.58 6.55,49.58 220UF.+
  Bottom 0.152: v39.47,34.8 39.47,62.54 40.08,63.14 | 40.08,63.14 41.3,64.36 41.3,67.87 40.23,68.94 X5.2 | v16.61,49.58 24.69,49.58 38.86,63.75 39.47,63.75 40.08,63.14
PI_RX  (via drill 0.35)
  Top 0.152: T2.4 90.98,56.44 90.83,56.44 89.92,57.35 89.92,58.27 81.99,66.19 81.99,66.95 81.08,67.87 51.36,67.87 50.29,68.94 X5.10 | v46.48,62.84 44.5,62.84 R19.1
  Bottom 0.152: v46.48,62.84 48.31,62.84 51.51,66.04 51.51,67.72 50.29,68.94 X5.10
PI_SCL
  Top 0.152: 47.09,57.66 48.46,57.66 48.92,57.2 R12.2 | 47.09,57.66 45.41,57.66 T1.4 | 47.09,57.66 47.09,64.52 45.26,66.34 X5.5
PI_SDA
  Top 0.152: 42.98,66.04 42.67,66.34 X5.3 42.98,66.04 | 42.98,66.04 43.43,65.58 43.43,59.18 T1.1 | 42.98,66.04 44.65,67.72 45.57,67.72 46.33,66.95 46.33,66.19 47.55,64.97 54.56,64.97 57.91,61.62 62.18,61.62 R1.2
PI_TX  (via drill 0.35)
  Top 0.152: v81.84,65.28 89.15,57.96 T2.1 | v48.77,64.36 48.77,62.38 48.92,62.23 49.07,62.23 49.53,61.77 R18.1
  Bottom 0.152: v81.84,65.28 54.86,65.28 53.95,66.19 53.95,66.95 53.03,67.87 52.27,67.87 51.51,68.63 51.51,69.39 50.75,70.16 48.92,70.16 47.85,69.09 X5.8 47.85,68.94 48.92,67.87 48.92,66.04 48.77,65.89 v48.77,64.36
PI_V  (via drill 0.35)
  Top 0.152: v26.67,35.1 C16.2 | v26.06,33.58 24.99,32.51 IC1.1 | IC2.3 76.05,27.94 76.05,36.78 78.64,39.37 680UF.+
  Bottom 0.152: v26.67,35.1 26.67,34.19 v26.06,33.58 26.06,19.56 17.98,11.48 17.98,8.89 19.51,7.37 64.31,7.37 66.14,9.2 66.14,21.54 78.64,34.04 78.64,39.37 680UF.+
PWRIN
  Top 0.152: D1.A 3.81,54.61 13.26,64.06 13.26,66.04 J3.VIN0
RESET  (via drill 0.35)
  Top 0.152: C8.2 61.42,15.29 64.16,18.03 64.16,18.95 C11.1 64.31,19.1 64.62,19.41 64.62,33.27 65.68,34.34 65.68,36.93 65.53,37.08 65.53,40.59 | 65.53,40.59 65.84,40.89 66.45,40.89 U4.29 | S1.3 16.31,65.43 21.79,65.43 S1.4 21.95,65.28 21.95,44.86 23.62,43.18 42.82,43.18 43.89,44.25 v47.4,44.25 | v74.83,58.42 R3.1 | TP6.P$1 49.53,41.96 47.09,41.96 ICSP.5 | v65.08,40.59 65.53,40.59
  Bottom 0.152: v74.83,58.42 63.7,58.42 55.47,50.19 | 48.46,43.18 47.09,41.81 ICSP.5 | 48.46,43.18 55.47,50.19 | 48.46,43.18 v47.4,44.25 | 55.47,50.19 v65.08,40.59
RX  (via drill 0.35)
  Top 0.152: v88.39,60.71 88.39,60.55 90.98,57.96 T2.6 | v72.39,60.71 71.48,59.79 R8.1 71.63,59.64 72.39,58.88 72.39,47.14 67.21,41.96 66.6,41.96 U4.30 | R20.1 42.52,46.99 v44.35,48.82
  Bottom 0.152: v88.39,60.71 v72.39,60.71 72.08,61.01 50.44,61.01 44.35,54.92 v44.35,48.82
RXD
  Top 0.152: R9.2 68.58,53.7 69.19,53.09 69.65,53.09 U1.4
RXLED
  Top 0.152: U1.17 75.13,53.09 80.77,53.09 80.92,53.24 LED4.C
SCK  (via drill 0.35)
  Top 0.152: ICSP.3 TP5.P$1 | v58.52,36.17 58.67,36.32 59.28,36.32 U4.17 | v38.71,8.28 41.3,8.28 X4.6
  Bottom 0.152: 57,36.17 53.49,36.17 50.29,39.37 ICSP.3 | 57,36.17 v58.52,36.17 | X3.6 19.05,10.11 20.88,8.28 v38.71,8.28 39.32,7.67 55.78,7.67 57,8.89 57,36.17
SCL
  Top 0.152: T1.3 43.43,57.66 40.39,57.66 39.93,57.2 R16.2
SDA  (via drill 0.35)
  Top 0.152: v44.5,59.03 45.26,59.03 T1.6 | v43.13,55.22 40.54,55.22 38.71,53.39 R17.2 | v56.24,40.59 57.3,39.52 57.91,39.52 U4.14 | v49.99,46.84 v51.51,45.31 | v47.09,12.55 47.09,9.2 46.18,8.28 45.26,8.28 44.65,8.89 44.65,11.02 43.59,12.09 42.52,12.09 40.69,10.26 X4.7
  Bottom 0.152: v44.5,59.03 44.5,58.57 42.98,57.05 42.98,55.37 v43.13,55.22 43.13,49.12 44.04,48.21 44.65,48.21 44.96,48.51 44.96,49.58 46.48,51.11 47.09,51.11 49.99,48.21 v49.99,46.84 | 51.66,45.16 v56.24,40.59 | v47.09,12.55 47.09,13 52.27,18.19 52.27,36.93 50.9,38.3 46.63,38.3 45.87,39.07 45.87,39.68 47.09,40.89 47.4,40.89 51.66,45.16 | 51.66,45.16 v51.51,45.31
TX  (via drill 0.35)
  Top 0.152: R21.1 88.24,44.55 89.15,45.47 89.15,56.29 T2.3 89.15,56.44 v87.63,56.44 | v70.26,55.68 69.95,55.98 69.95,60.71 68.89,61.77 68.58,61.77 R9.1 | v67.82,43.49 67.06,42.72 66.6,42.72 U4.31
  Bottom 0.152: v67.82,43.49 70.26,45.92 v70.26,55.68 71.02,56.44 v87.63,56.44
TXD
  Top 0.152: R8.2 73.3,59.64 73.3,56.74 74.98,55.07 U1.20
TXLED
  Top 0.152: U1.10 69.65,49.28 66.14,49.28 LED3.C
USBVCC  (via drill 0.35)
  Top 0.152: v55.02,39.98 53.34,38.3 C15.+ | v65.84,33.12 67.21,33.12 F1.2 | 88.39,34.04 88.39,32.05 82.6,26.26 C12.1 | 88.39,34.04 88.39,35.1 89.46,36.17 89.46,42.11 89.31,42.27 88.09,42.27 83.67,46.69 83.67,48.21 Q1.3 | 88.39,34.04 87.17,34.04 86.87,34.34 86.87,35.1 85.8,36.17 85.8,40.89 83.06,43.64 81.84,43.64 77.57,47.9 77.57,49.73 75.59,51.71 75.13,51.71 U1.15 74.98,51.71 74.52,51.71 v73.91,51.11
  Bottom 0.152: v55.02,39.98 58.98,39.98 62.18,36.78 | v65.84,33.12 62.18,36.78 | 62.18,36.78 70.56,45.16 70.56,51.41 70.87,51.71 73.3,51.71 v73.91,51.11
VIN  (via drill 0.35)
  Top 0.152: D1.C 3.81,20.47 7.62,16.66 C5.+ X2.1 | v89.92,30.07 89.92,34.95 IC3.3
  Bottom 0.152: v89.92,30.07 71.02,11.18 71.02,8.89 69.19,7.06 10.67,7.06 7.62,10.11 X2.1
VUSB
  Top 0.152: F1.1 67.36,30.23 67.36,23.98 73,18.34 73.61,18.34 C10.1 73.76,18.19 84.58,7.37 87.63,7.37 JP12.VBUS

## Text on the board
Reference: Group 8 / Rev.2 / 2020_11_08